# Altium PCB self.PcbDoc
Units mil, origin at the board's own origin, x right, y up, seen from the top; angles counter-clockwise.
Board outline 2675 x 2675 mil, 2 copper layers (Top Layer, Bottom Layer); 45 components, 40 nets, 191 pads, 56 vias.
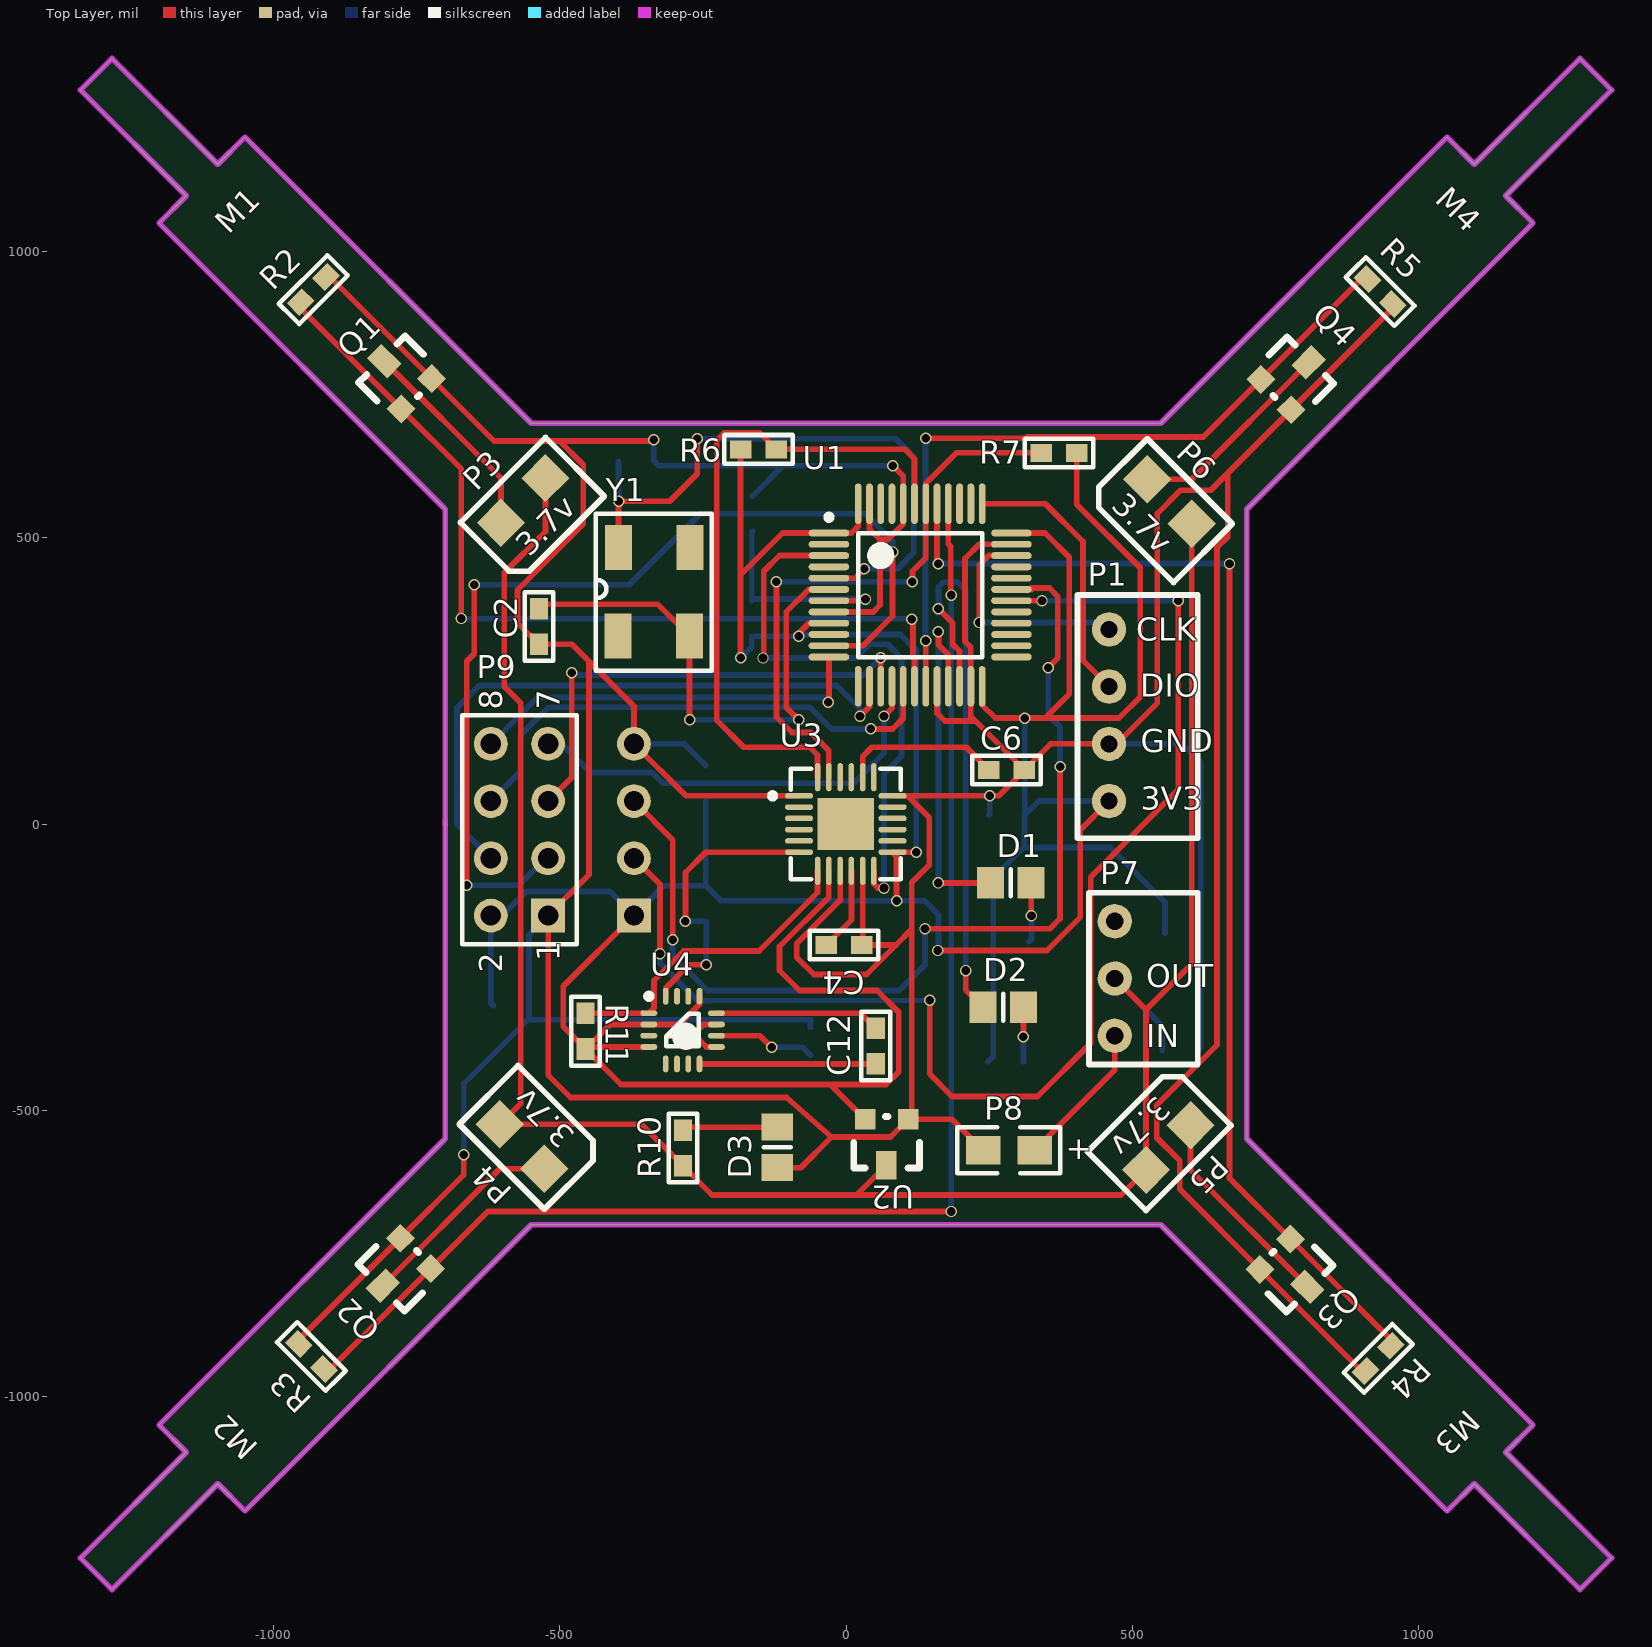
[diagram p0: Top Layer view]
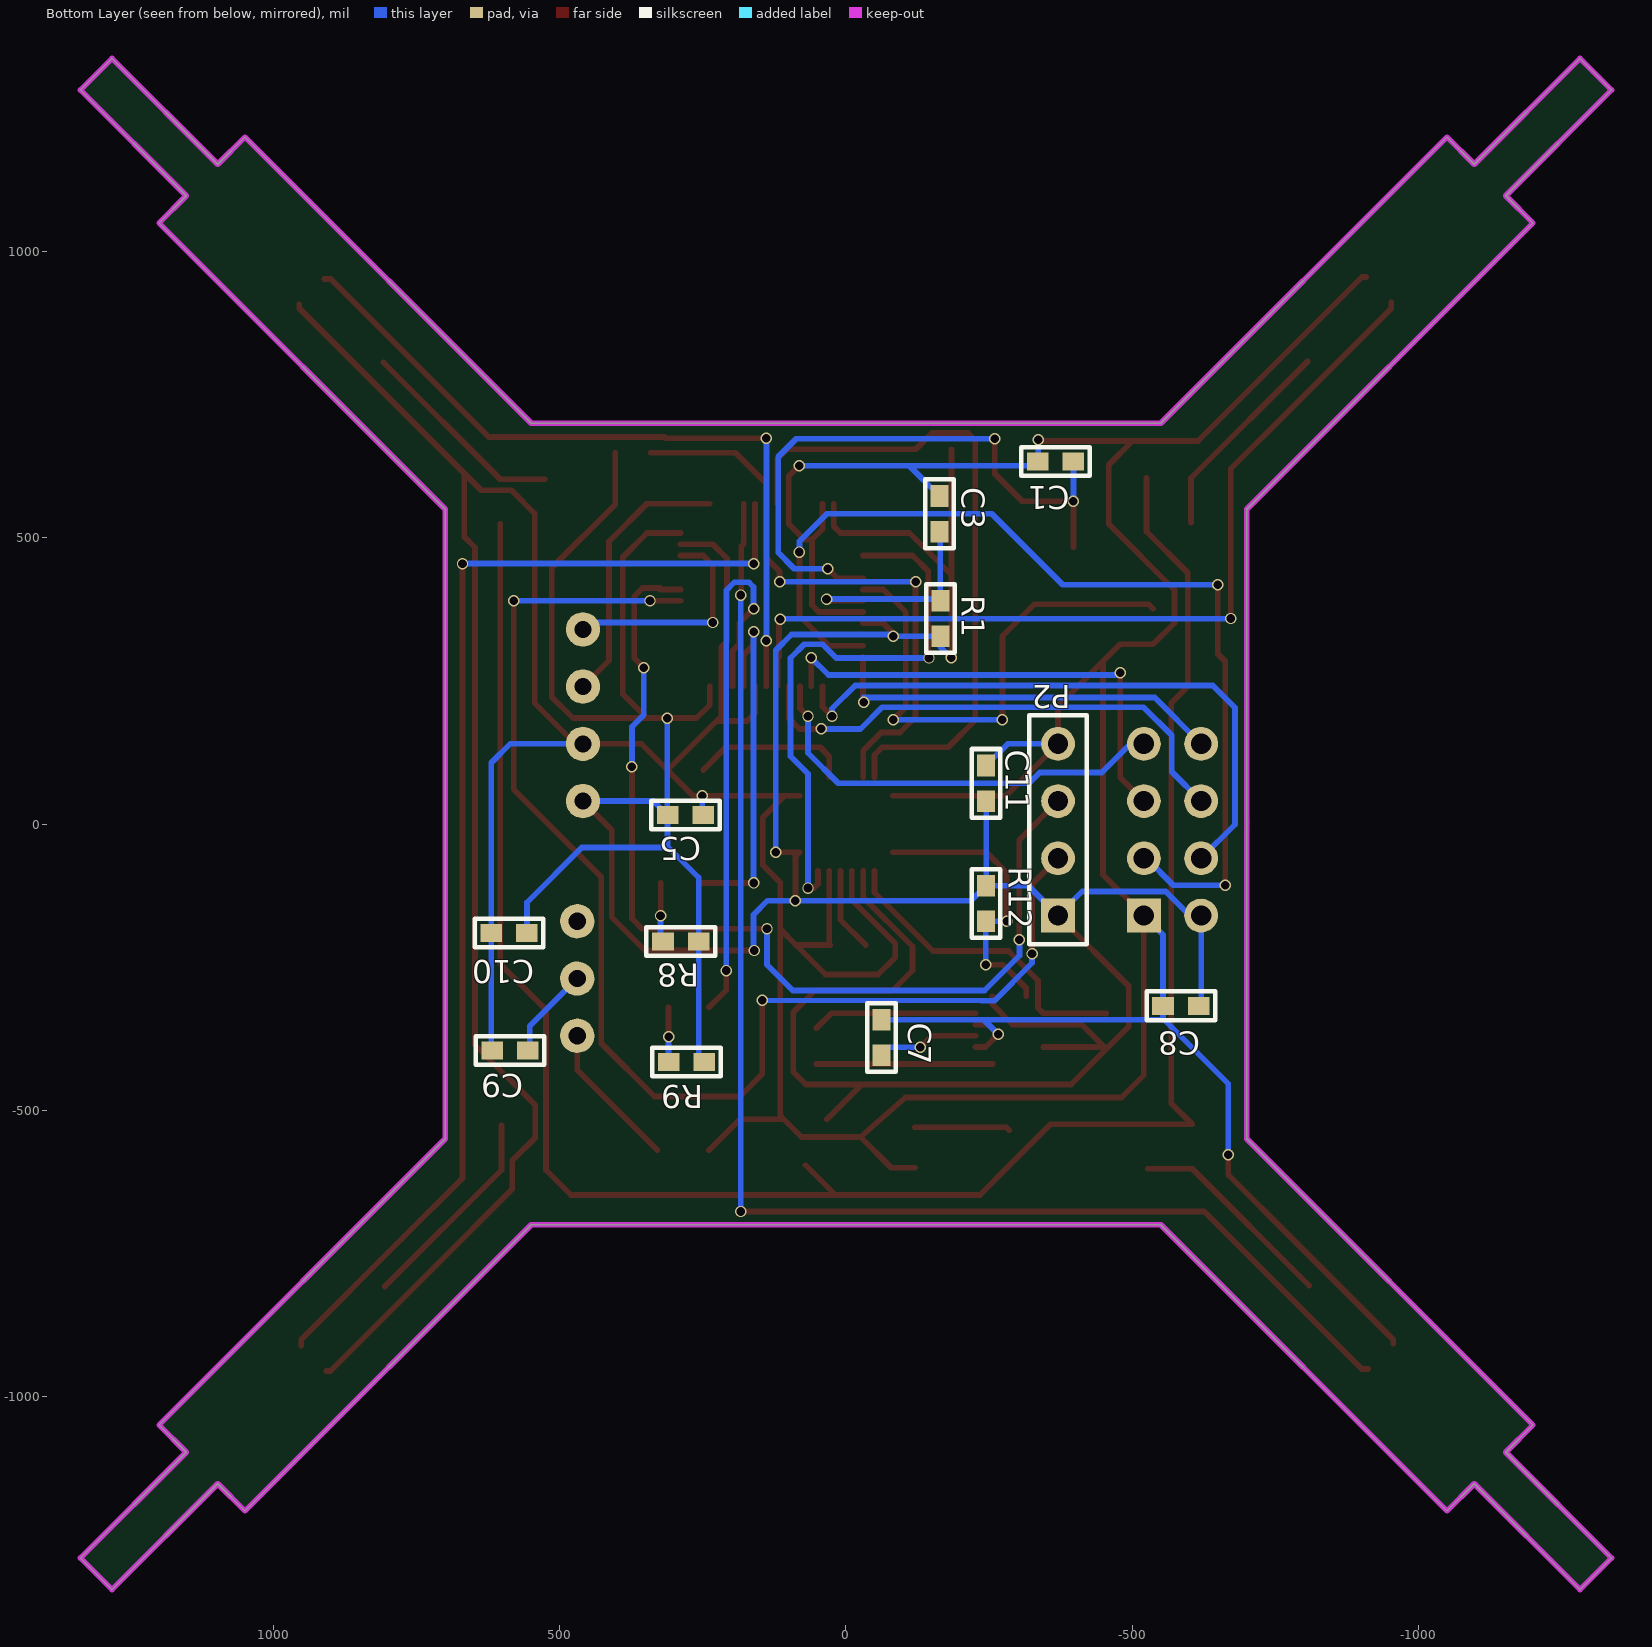
[diagram p1: Bottom Layer view, seen from below]
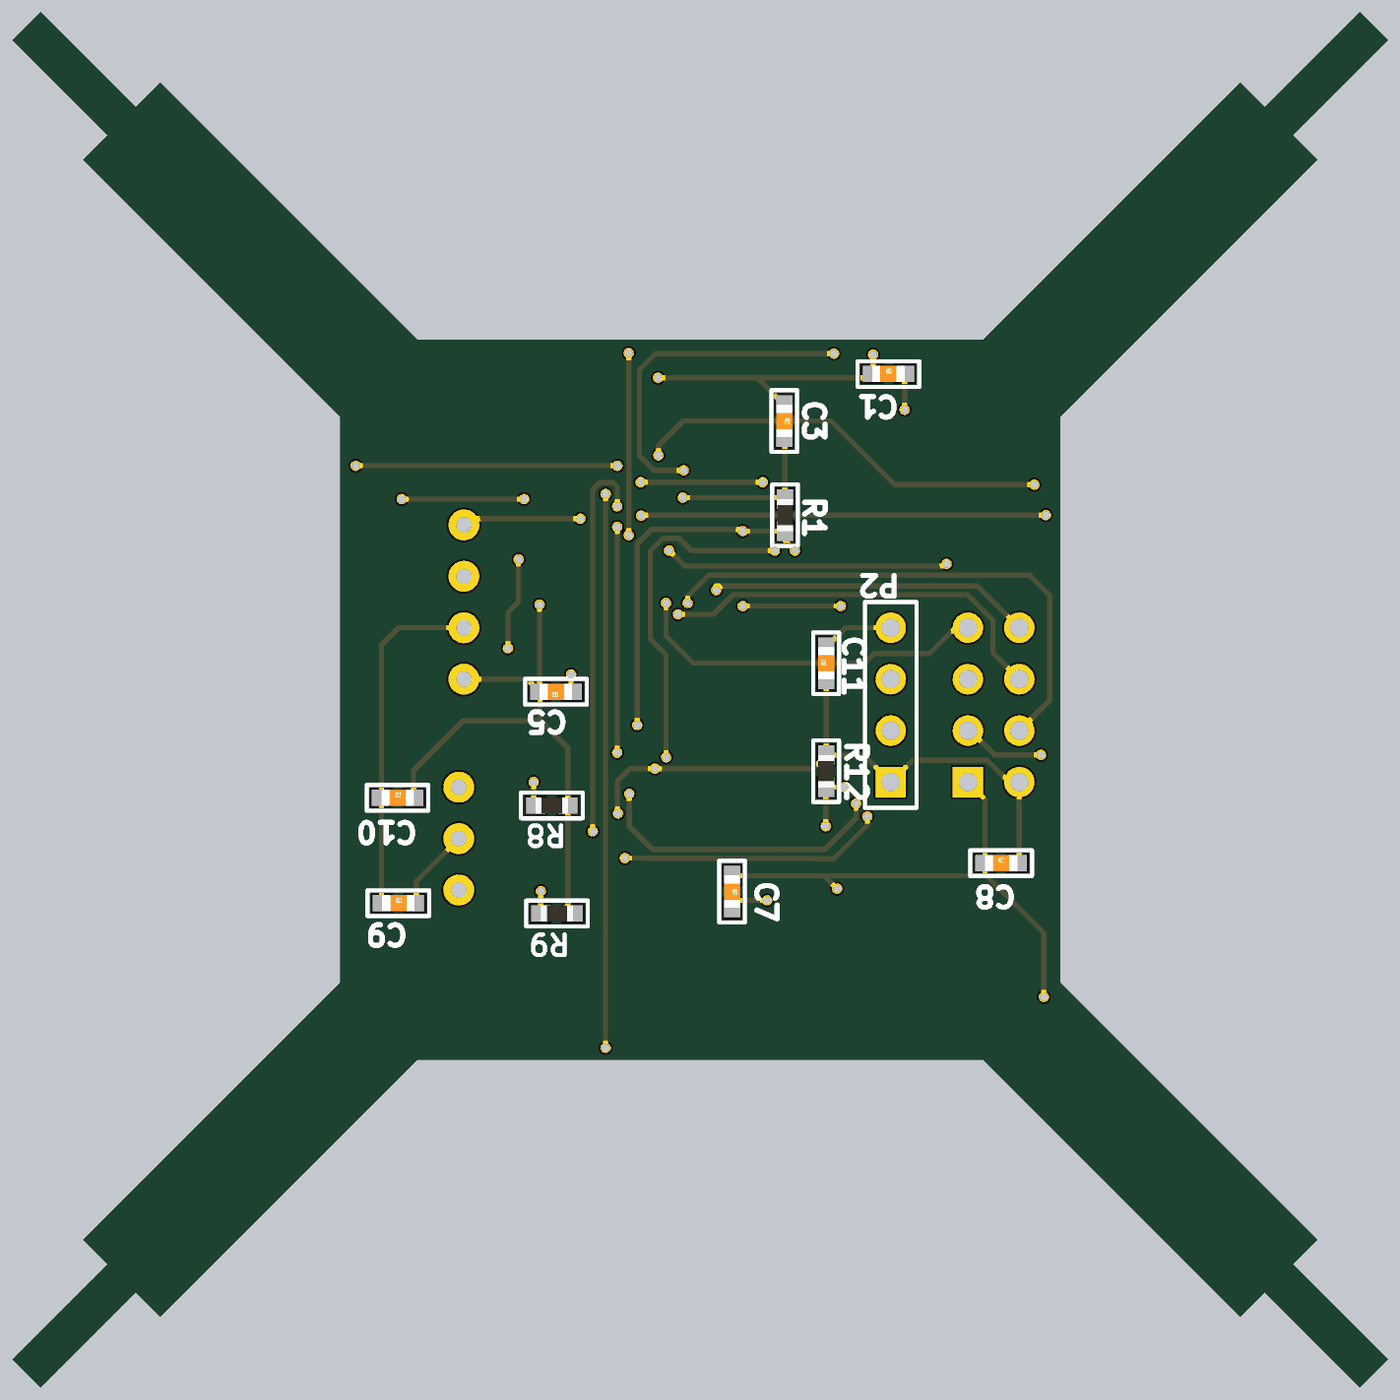
[diagram p2: 3D render of the assembled board from below, using the file's embedded part models]

## Layer stack, top to bottom
Top Solder: solder mask 0.4, Solder Resist, Dk 3.5
Top Layer: signal copper 1.4
Dielectric 1: dielectric 12.6, FR-4, Dk 4.8
Bottom Layer: signal copper 1.4
Bottom Solder: solder mask 0.4, Solder Resist, Dk 3.5

## Board outline
-1337.5,-1282.5 -1282.5,-1337.5 -1097.5,-1152.5 -1050,-1200 -550,-700 550,-700 1050,-1200 1097.5,-1152.5 1282.5,-1337.5 1337.5,-1282.5 1152.5,-1097.5 1200,-1050 700,-550 700,550 1200,1050 1152.5,1097.5 1337.5,1282.5 1282.5,1337.5 1097.5,1152.5 1050,1200 550,700 -550,700 -1050,1200 -1097.5,1152.5 -1282.5,1337.5 -1337.5,1282.5 -1152.5,1097.5 -1200,1050 -700,550 -700,-550 -1200,-1050 -1152.5,-1097.5

## Design rules (kind name [scope] priority, off if disabled: settings)
Clearance [All] p1: gap=7
MinimumSolderMaskSliver [All] p1: minsoldermaskwidth=0
PolygonConnect [All] p1: connectstyle=Relief reliefconductorwidth=10 reliefentries=4 polygonreliefangle="90 Angle" airgapwidth=10
RoutingVias [All] p1: holewidth=15 width=20 viastyle="Through Hole" minholewidth=15 minwidth=20 maxholewidth=20 maxwidth=25
SilkToSilkClearance [All] p1: silktosilkclearance=0
SilkToSolderMaskClearance [IsPad] p1: minsilkscreentomaskgap=1 clearancetoexposedcopper=TRUE
SolderMaskExpansion [All] p1: expansion=4
Width VCC3.7 [InNet('VCC_3.7VOUT')] p1 off: maxlimit=15 minlimit=10 preferedwidth=15
Width VCC [InNet('VCC')] p2 off: maxlimit=15 minlimit=10 preferedwidth=15
Width GND [InNet('GND')] p3 off: maxlimit=15 minlimit=10 preferedwidth=15
Width ALL [All] p4: maxlimit=15 minlimit=7 preferedwidth=10
26 further rules are at their usual default settings.

## Components (designator, comment, footprint, x,y, rotation, side; value= is the part's Value field where it differs from the comment)
C1 "Cap Semi" 0603-N-CAP -305,659 r180 bottom
C2 "Cap Semi" 0603-N-CAP -511,406 r270 top
C3 "Cap Semi" 0603-N-CAP -189,603 r270 bottom
C4 "Cap Semi" 0603-N-CAP 57.63,-237 r180 top
C5 "Cap Semi" 0603-N-CAP 219.58,-10 r0 bottom
C6 "Cap Semi" 0603-N-CAP 219.58,120 r0 top
C7 "Cap Semi" 0603-N-CAP -87.42,-312 r270 bottom
C8 "Cap Semi" 0603-N-CAP -524,-292 r180 bottom
C9 "Cap Semi" 0603-N-CAP 648,-370 r180 bottom
C10 "Cap Semi" 0603-N-CAP 649.58,-165 r180 bottom
C11 "Cap Semi" 0603-N-CAP -219.23,10 r90 bottom
C12 "Cap Semi" 0603-N-CAP 77.58,-327 r270 top
D1 "LED2" 6-0805_N 288,-103 r180 top
D2 "LED2" 6-0805_N 274.58,-320 r180 top
D3 "LED2" 6-0805_N -120.42,-565 r270 top
P1 "Header 4" SW_download 404.58,400 r0 top
P2 "Header 4" HDR1X4 -370.42,-160 r90 bottom
P3 "Motor1" Motor -555.42,555 r45 top
P4 "Motor2" Motor -555.42,-555 r135 top locked
P5 "Motor3" Motor 554.58,-555 r225 top
P6 "Motor4" Motor 554.58,555 r315 top
P7 "Switch" SWITCH 424.58,-120 r0 top
P8 "Power" 0805 329.58,-570 r180 top
P9 "NRF24L01" HDR2X4 -520.42,-160 r90 top
Q1 "SI2302" SOT-23 -805.42,810 r45 top
Q2 "SI2302" SOT-23 -810.42,-805 r135 top
Q3 "SI2302" SOT-23 804.58,-810 r225 top
Q4 "SI2302" SOT-23 809.58,805 r315 top
R1 "Res2" 0603-N-res -190.42,425 r270 bottom
R2 "Res1" 0603-N-res -995.42,905 r45 top
R3 "Res1" 0603-N-res -905.42,-995 r135 top
R4 "Res1" 0603-N-res 994.58,-905 r225 top
R5 "Res1" 0603-N-res 904.58,995 r315 top
R6 "Res2" 0603-N-res -87,629 r180 top
R7 "Res2" 0603-N-res 306,674 r0 top
R8 "Res2" 0603-N-res 354.58,-180 r180 bottom
R9 "Res2" 0603-N-res 344.58,-390 r180 bottom
R10 "Res2" 0603-N-res -259.24,-500 r270 top
R11 "Res2" 0603-N-res -429.24,-296 r270 top
R12 "Res2" 0603-N-res -219.24,-205 r90 bottom
U1 "STM32F103C8T6" LQFP48_N 129.58,400 r0 top
U2 "XC6206" SOT-23 68.58,-596 r180 top
U3 "MPU6050" "MPU 6050" -0.42,0 r0 top
U4 "HMC5883" HMC5883L -285.42,-375 r0 top
Y1 "8MHZ" 5032 -230,264 r180 top

## Footprints (in the part's own frame and the unit in brackets; to place one, negate y for a bottom-side part, rotate by r counter-clockwise, add the part's x,y. Pads: shape width x height; smd on the part's side, far side on the other; paste and mask are expansions set on the pad)
6-0805_N [mm] "Chip Resistor, Body 2.0x1.2mm, IPC Medium Density"
  rect 1.2x1.4 smd: 1(-0.9,0) 2(0.9,0)
  silkscreen extent 0,-0.6 0,0.6, body extent -1.07,-0.7 1.07,0.7, height 0.7
0603-N-CAP [mm]
  rect 0.96x0.8 smd: 1(0.76,-0.65) 2(2.34,-0.65)
  silkscreen extent 0.03,-1.29 3.07,-0.02, body extent 0.75,-1.05 2.35,-0.25, height 0.3
0603-N-res [mm]
  rect 0.96x0.8 smd: 1(0.887,-0.65) 2(2.467,-0.65)
  silkscreen extent 0.15,-1.28 3.2,-0.01, body extent 0.88,-1.05 2.48,-0.25, height 0.4
0805 [mil]
  rect 60x50 smd: 1(0,0) 2(90,0)
  silkscreen extent -45,-40 135,40
5032 [mm]
  rect 1.2x2 smd: 1(1.1,-1.633) 2(1.075,-5.57) 3(4.25,-5.57) 4(4.275,-1.633)
  silkscreen extent 0.11,-7.07 5.27,-0.08, body extent 1.1,-6.1 4.3,-1.07, height 0.8
HDR1X4 [mm] "Connector; Header; 4 Position"
  rect 1.5x1.5 hole 0.9: 1(0,0)
  round 1.5 hole 0.9: 2(2.54,0) 3(5.08,0) 4(7.62,0)
  silkscreen extent -1.27,-1.27 8.89,1.27
HDR2X4 [mm] "Connector; Header; 4x2 Position"
  rect 1.5x1.5 hole 0.9: 1(0,0)
  round 1.5 hole 0.9: 2(0,2.54) 3(2.54,0) 4(2.54,2.54) 5(5.08,0) 6(5.08,2.54) 7(7.62,0) 8(7.62,2.54)
  silkscreen extent -1.27,-1.27 8.89,3.81
HMC5883L [mm]
  oval 0.75x0.254 smd: 1(-1.5,1.131) 2(-1.5,0.631) 3(-1.5,0.131) 4(-1.5,-0.369) 9(1.5,-0.369) 10(1.5,0.131) 11(1.5,0.631) 12(1.5,1.131)
  oval 0.254x0.75 smd: 5(-0.75,-1.119) 6(-0.25,-1.119) 7(0.25,-1.119) 8(0.75,-1.119) 13(0.75,1.881) 14(0.25,1.881) 15(-0.25,1.881) 16(-0.75,1.881)
  silkscreen extent -1.62,-0.34 0.72,2.01, body extent -1.5,-1.12 1.5,1.88, height 0.9
LQFP48_N [mm] "Thin QFP, 48-Leads, Body 7x7mm, Pitch 0.5mm, IPC Medium Density"
  oval 1.8x0.3 smd: 1(-4.05,2.75) 2(-4.05,2.25) 3(-4.05,1.75) 4(-4.05,1.25) 5(-4.05,0.75) 6(-4.05,0.25) 7(-4.05,-0.25) 8(-4.05,-0.75) 9(-4.05,-1.25) 10(-4.05,-1.75) 11(-4.05,-2.25) 12(-4.05,-2.75) 25(4.05,-2.75) 26(4.05,-2.25) 27(4.05,-1.75) 28(4.05,-1.25) 29(4.05,-0.75) 30(4.05,-0.25) 31(4.05,0.25) 32(4.05,0.75) 33(4.05,1.25) 34(4.05,1.75) 35(4.05,2.25) 36(4.05,2.75)
  oval 0.3x1.8 smd: 13(-2.75,-4.05) 14(-2.25,-4.05) 15(-1.75,-4.05) 16(-1.25,-4.05) 17(-0.75,-4.05) 18(-0.25,-4.05) 19(0.25,-4.05) 20(0.75,-4.05) 21(1.25,-4.05) 22(1.75,-4.05) 23(2.25,-4.05) 24(2.75,-4.05) 37(2.75,4.05) 38(2.25,4.05) 39(1.75,4.05) 40(1.25,4.05) 41(0.75,4.05) 42(0.25,4.05) 43(-0.25,4.05) 44(-0.75,4.05) 45(-1.25,4.05) 46(-1.75,4.05) 47(-2.25,4.05) 48(-2.75,4.05)
  silkscreen extent -4.17,-2.75 2.75,3.57, body extent -3.5,-3.5 3.5,3.5, height 1.6
Motor [mil]
  rect 60x60 smd: 1(56.42,13.43) 2(-53.58,13.43)
  silkscreen extent -104,-82 106,63
"MPU 6050" [mm]
  oval 1.25x0.25 smd: 1(-2.075,1.25) 2(-2.075,0.75) 3(-2.075,0.25) 4(-2.075,-0.25) 5(-2.075,-0.75) 6(-2.075,-1.25) 13(2.075,-1.25) 14(2.075,-0.75) 15(2.075,-0.25) 16(2.075,0.25) 17(2.075,0.75) 18(2.075,1.25)
  oval 0.25x1.25 smd: 7(-1.25,-2.075) 8(-0.75,-2.075) 9(-0.25,-2.075) 10(0.25,-2.075) 11(0.75,-2.075) 12(1.25,-2.075) 19(1.25,2.075) 20(0.75,2.075) 21(0.25,2.075) 22(-0.25,2.075) 23(-0.75,2.075) 24(-1.25,2.075)
  rect 2.5x2.3 smd: 25(0,0)
  silkscreen extent -3.37,-2.45 2.45,2.45, body extent -2.41,-2.41 2.41,2.41, height 0.9
SOT-23 [mil]
  rect 36x36 smd: 1(-40,-80) 2(35,-80)
  rect 36x50 smd: 3(-2,0)
  silkscreen extent -60,-85 55,5
SW_download [mil]
  round 60 hole 30: 1(55,-360) 2(55,-260) 3(55,-160) 4(55,-60)
  silkscreen extent 0,-425 210,0
SWITCH [mil]
  round 60 hole 30: 1(45,-250) 2(45,-150) 3(45,-50)
  silkscreen extent 0,-300 190,0

## Part data
C1 C2 C3 C4 C5 C6 C7 C8 C9 C10 C11 C12: "Capacitor (Semiconductor SIM Model)"
D1 D2 D3: "Typical RED, GREEN, YELLOW, AMBER GaAs LED"
P1 P2: "Header, 4-Pin"
P3 P4 P5 P6 P8: library part "Header 2", "Header, 2-Pin"
P7: library part "Header 3", "Header, 3-Pin"
P9: library part "Header 4X2H", "Header, 4-Pin, Dual row, Right Angle"
Q1 Q2 Q3 Q4: library part MOSFET-N, "N-Channel MOSFET"
R1 R2 R3 R4 R5 R6 R7 R8 R9 R10 R11 R12: "Resistor"
U1: "STM32 ARM-based 32-bit MCU with 64 Kbytes Flash, 48-pin LQFP, Industrial Temperature"
Y1: library part XTAL, "Crystal Oscillator"

## Via types
v1: diameter 20, hole 15, Top Layer to Bottom Layer, 56 vias

## Nets (pads, with @x,y where several pads share a name; then routed paths per layer and width w, separated by ;. In a path a pad name is that pad's centre, name@x,y a point inside that pad or via, vN(x,y) a via of type N, cw(c..) or ccw(c..) an arc to the next point about the centre after c; other vN are vias at no path point)
AUX_CL: R11.1 U3.7 U4.1 | length 558.8
  Top Layer w10: R11.1 -454.38,-330.47 U4.1 -335.58,-321.58 -335.58,-273.48 -284.1,-222 -152,-222 -49.63,-119.63 U3.7
AUX_DA: R12.1 U3.6 U4.16 | length 512.4
  Top Layer w10: U4.16 -314.94,-286.82 -274.12,-246 v1(-244,-246) ; v1(-280.58,-170.08) -280.58,-84.88 -244.92,-49.22 U3.6
  Bottom Layer w10: v1(-280.58,-170.08) R12.1 -244,-170.91 v1(-244,-246)
CE: P9.3 U1.11 | length 1758.1
  Top Layer w10: v1(-662.58,-107) -662.58,284.42 -649.58,297.42 v1(-649.58,418.12) ; U1.11 29.72,311.42 81.42,363.12 v1(81.42,475.12)
  Bottom Layer w10: v1(-662.58,-107) -571.74,-107 -524.74,-60 P9.3 ; v1(-649.58,418.12) -378.58,418.12 -254.58,542.12 33.42,542.12 81.42,494.12 v1(81.42,475.12)
CSN: P9.4 U1.14 | length 1097.3
  Top Layer w10: v1(24.42,188.12) 41,204.7 U1.14
  Bottom Layer w10: P9.4 -679.58,-0.84 -679.58,203.12 -640.67,242.03 -16.03,242.03 24.42,201.58 v1(24.42,188.12)
GND: C1.1 C2.2 C3.1 C4.1 C5.1 C6.2 C7.1 C8.1 C9.1 C10.1 C11.2 D3.2 P1.2 P2.4 P8.2 P9.1 Q1.2 Q2.2 Q3.2 Q4.2 R2.2 R3.2 R4.2 R5.2 U1.8 U1.20 U1.23 U1.35 U1.44 U1.47 U2.1 U3.1 U3.9 U3.11 U3.18 U4.9 U4.11 | length 11858.5
  Top Layer w10: R3.2 -956,-901.09 Q2.2 -668,-613.08 v1(-668,-577.88) ; R2.2 -901.5,955.58 Q1.2 -615.04,669.12 -500.58,669.12 ; P9.1@-520.42,-170.72 -520.42,-438.58 -481.12,-477.88 -103.58,-477.88 -25.58,-546.88 ; P9.1 -449,-88.58 -449,284.29 ; v1(-336,671) -337.88,669.12 -500.58,669.12 ; U4.9 -243.77,-389.53 v1(-266,-367.3) -248.86,-350.16 U4.11 ; D3.2 -79.13,-600.43 -25.58,-546.88 ; U3.1 -279.63,49.21 P2.4 -370.42,205.71 -478.58,313.87 C2.2 -574,351.28 -574,409 -459,524 -459,627.54 -500.58,669.12 ; U1.8 47.47,370.47 59.42,382.42 59.42,497.12 ; U3.9 -10.26,-133.26 -86,-209 -86,-233 -56,-263 36,-263 87.59,-211.41 ; C4.1 87.59,-211.41 ; C4.1@29.11,-210 U3.11 ; U1.47 41,515.54 59.42,497.12 ; U3.18 107.33,49.21 ; v1(82,626) 100.06,607.94 U1.44 100.06,524.28 72.89,497.12 59.42,497.12 ; U1.20 159.11,193.89 173,180 225.88,180 218.17,187.72 U1.23 218.17,308.83 208,319 208,463.7 232.88,488.58 U1.35 ; 226,180.12 C6.2 ; P8.2 185.58,-516 U2.1 ; 667,613 667,502 648,483 648,413 648,-386 543,-491 543,-548 583,-588 583,-637.91 Q3.2 900.67,-955.58 R4.2 ; R5.2 955.17,901.09 Q4.2 637.08,583 584.3,583 544,542.7 544,211.58 472.42,140 P1.2 357.3,140 C6.2 ; -25.58,-546.88 77.7,-546.88 U2.1 ; 87.59,-211.41 115,-184 ; 107.33,49.21 v1(251,49.21) 267.21,49.21 312.06,94.06 C6.2 ; 107.33,49.21 145.42,11.12 145.42,-71.88 115,-102.3 115,-184 ; U2.1 115,-509.58 115,-184
  Bottom Layer w10: v1(-668,-577.88) -668,-454 -553.92,-339.92 C8.1 -553.92,-193.5 P9.1 ; -553.92,-341.92 -240.62,-341.92 ; P2.4 -282.7,140 C11.2 ; v1(-336,671) -336,634.48 C1.1 -327.52,626 -110.49,626 ; v1(-266,-367.3) -240.62,-341.92 ; C3.1 -110.49,626 ; C7.1@-61.83,-354.88 C7.1 -240.62,-341.92 ; v1(82,626) -110.49,626 ; C5.1 251,17.09 v1(251,49.21) ; P1.2 586.78,140 619.66,107.12 C10.1 619.66,-390.59 C9.1@614.66,-395.59
"IIC1 SCL": R7.1 U1.42 U3.23 | length 1041.5
  Top Layer w10: v1(-121.58,423) -121.58,186.73 -94.58,159.73 -61.73,159.73 -29.94,127.94 U3.23 ; v1(116,423) 116,441.54 139.43,464.96 U1.42 139.43,595.13 192.71,648.41 R7.1
  Bottom Layer w10: v1(-121.58,423) v1(116,423)
"IIC1 SDA": R6.1 U1.43 U3.24 | length 1177.2
  Top Layer w10: U3.24 -49.63,120.63 -63.12,134.12 -178.58,134.12 -226,181.54 -226,670 -213,683 -150.33,683 R6.1 102.95,654.59 119.74,637.8 U1.43
INT: U1.3 U3.12 | length 996.7
  Top Layer w10: v1@-143.58,290 -143.58,441.42 -116.1,468.9 U1.3 ; U3.12 48.8,-104.8 55.88,-111.88 v1(66.42,-111.88)
  Bottom Layer w10: v1(-145,290) 17,290 41.06,314.06 73.08,314.06 97,290.15 97,118.53 66.42,87.94 v1(66.42,-111.88)
IRQ: P9.8 U1.12 | length 711.8
  Top Layer w10: v1(-31,213) -29.87,214.13 U1.12
  Bottom Layer w10: P9.8 -539.3,221.12 -30,221.12 -31,220.12 v1(-31,213)
"LED GRE": D2.2 U1.22 | length 986.5
  Top Layer w10: v1(161.42,376.12) 186.42,351.12 186.42,314.12 198.48,302.06 U1.22 ; v1(209,-256) 209,-289.85 D2.2
  Bottom Layer w10: v1(161.42,376.12) 161.42,414.12 169.42,422.12 195.42,422.12 209,408.54 v1(209,-256)
"LED RED": D1.2 U1.21 | length 633
  Top Layer w10: v1(161.42,-103) D1.2 ; v1(161.42,336.12) 161.42,313.12 178.8,295.74 U1.21
  Bottom Layer w10: v1(161.42,-103) v1(161.42,336.12)
MISO: P9.7 U1.16 | length 759.5
  Top Layer w10: v1(66.42,188.12) 80.37,202.07 U1.16
  Bottom Layer w10: P9.7 -496.58,140 -446.7,90.12 -338.58,90.12 -319.58,71.12 13.42,71.12 66.42,124.12 v1(66.42,188.12)
MOSI: P9.6 U1.17 | length 905
  Top Layer w10: v1(43.42,166.12) 81.42,166.12 100.06,184.76 U1.17
  Bottom Layer w10: P9.6 -569,91.42 -569,155 -519.88,204.12 -63.12,204.12 -25.12,166.12 v1(43.42,166.12)
NetC1_2: C1.2 U1.5 Y1.3 | length 1094
  Top Layer w10: Y1.3 v1(-397.32,564) -308,564 -260,612 v1(-260,673) ; U1.5 15.53,429.53 v1(32,446)
  Bottom Layer w10: v1(-397.32,564) C1.2@-397.32,633.41 ; v1(-260,673) 87,673 118.42,641.58 118.42,474.12 90.3,446 v1(32,446)
NetC2_1: C2.1 U1.6 Y1.1 | length 915
  Top Layer w10: C2.1 -528.55,384.12 -329.13,384.12 Y1.1 v1(-273.32,182.12) ; v1(-82.58,182.12) -104.58,204.12 -104.58,370.29 -65.03,409.84 U1.6
  Bottom Layer w10: v1(-273.32,182.12) v1(-82.58,182.12)
NetC3_2: C3.2 R1.1 U1.7 | length 386.5
  Top Layer w10: U1.7 31.16,390.16 v1(34,393)
  Bottom Layer w10: C3.2 -164.83,509.45 R1.1 -161.91,393 v1(34,393)
NetC4_2: C4.2 U3.10 | length 147.9
  Top Layer w10: C4.2 9.43,-167.49 U3.10
NetC6_1: C6.1 U3.20 | length 279.8
  Top Layer w10: U3.20 29.11,118.11 45,134 209.92,134 C6.1
NetC7_2: C7.2 U4.10 | length 178.7
  Top Layer w10: U4.10 -150.16,-369.84 v1(-130,-390)
  Bottom Layer w10: v1(-130,-390) -75.95,-390 C7.2
NetC12_1: C12.1 U4.12 | length 289.3
  Top Layer w10: U4.12 25.54,-330.47 C12.1
NetC12_2: C12.2 U4.8 | length 307.9
  Top Layer w10: U4.8 -255.82,-419.13 C12.2
NetD1_1: D1.1 R8.1 | length 104.6
  Top Layer w10: D1.1 323.43,-159.43 v1(324,-160)
  Bottom Layer w10: R8.1 324,-201.25 v1(324,-160)
NetD2_1: D2.1 R9.1 | length 95.7
  Top Layer w10: v1(310.02,-372) D2.1
  Bottom Layer w10: R9.1 310.02,-415.24 v1(310.02,-372)
NetD3_1: D3.1 R10.1 | length 166.6
  Top Layer w10: R10.1 -279.47,-529.57 D3.1
NetP3_2: P3.2 Q1.3 | length 366.5
  Top Layer w10: Q1.3 -602.8,604.55 P3.2
NetP4_2: P4.2 Q2.3 | length 366.5
  Top Layer w10: Q2.3 -604.97,-602.38 P4.2
NetP5_2: P5.2 Q3.3 | length 366.5
  Top Layer w10: P5.2 601.97,-604.56 Q3.3
NetP6_2: P6.2 Q4.3 | length 366.5
  Top Layer w10: P6.2 604.14,602.38 Q4.3
PWM_DOWN: Q4.1 R5.1 U1.19 | length 1321
  Top Layer w10: v1(139,320) 139.43,319.57 U1.19 ; v1(139,674) 314.9,674 317.05,676.16 624.17,676.16 Q4.1 900.23,952.21 R5.1
  Bottom Layer w10: v1(139,320) v1(139,674)
PWM_LEFT: Q1.1 R2.1 U1.18 | length 2362.3
  Top Layer w10: R2.1 -952.63,900.65 Q1.1 -672,620.02 v1(-672,359) ; v1(115,358) 117,356 117,292 119.74,289.26 U1.18
  Bottom Layer w10: v1@-672,358.77 115,358.77 v1@-672,358.77
PWM_RIGHT: Q2.1 R3.1 U1.40 | length 2448.6
  Top Layer w10: R3.1 -901.06,-952.21 Q2.1 -625.85,-677 v1(184,-677) ; U1.40 178.8,489.2 183,485 183,401 v1(184,400)
  Bottom Layer w10: v1(184,-677) v1(184,400)
PWM_UP: Q3.1 R4.1 U1.41 | length 2097.6
  Top Layer w10: U1.41 159.11,456.89 v1(161,455) ; v1(670,455) 670,-618.85 Q3.1 951.8,-900.65 R4.1
  Bottom Layer w10: v1(161,455) v1(670,455)
RXD: P2.3 U1.31 | length 1757.2
  Top Layer w10: P2.3 -302.58,-27.83 v1@-302.58,-201.88 ; v1(138,-183) 356.3,-183 374,-165.3 v1(374,100) ; U1.31 324.42,409.84 324.42,412.16 355.38,412.16 370,397.54 370,290 v1(353,273)
  Bottom Layer w10: v1(-303,-201.88) -303,-230 -242.12,-290.88 93.12,-290.88 138,-246 v1(138,-183) ; v1(353,273) 353.42,272.58 353.42,190.58 374,170 v1(374,100)
SCK: P9.5 U1.15 | length 844.7
  Top Layer w10: P9.5 -478.89,81.53 v1@-478.89,264.12 ; U1.15 v1(60.69,290.12)
  Bottom Layer w10: v1(-479,264.12) -475,260.12 30.69,260.12 v1(60.69,290.12)
SWCLK: P1.3 U1.37 | length 475.9
  Top Layer w10: U1.37 348.09,559.45 414,493.54 414,285.58 P1.3
SWDIO: P1.4 U1.34 | length 402
  Top Layer w10: v1(233,352) 233,452.48 249.42,468.9 U1.34
  Bottom Layer w10: v1@233,352.12 459.58,352.12 P1.4
TXD: P2.2 U1.30 | length 2293
  Top Layer w10: P2.2 -325,-105.42 v1(-325,-227) ; v1(146.42,-307.88) 146.42,-436.88 185.42,-475.88 334.42,-475.88 427.42,-382.88 427.42,-92.58 580.42,60.42 v1(580.42,390.16) ; U1.30 v1(342.42,390.16)
  Bottom Layer w10: v1(-325,-227) -325,-243 -259,-309 -237,-309 v1(146.42,-307.88) ; v1(342.42,390.16) v1(580.42,390.16)
VCC: C5.2 C8.2 C10.2 C11.1 P1.1 P2.1 P9.2 R1.2 R6.2 R7.2 R8.2 R9.2 R11.2 R12.2 U1.1 U1.9 U1.24 U1.36 U1.48 U2.2 U3.8 U3.13 U4.2 U4.4 U4.13 | length 7520.9
  Top Layer w10: P2.1 -494,-283.58 -494,-353.95 R11.2 ; U4.4 R11.2@-451.23,-389.53 ; U4.13 -255.89,-315.07 -290.98,-350.16 U4.2 -411.86,-350.16 R11.2@-451.23,-389.53 ; v1(-184.13,290.12) R6.2 ; -184.13,434.87 -110.73,508.27 U1.1 9.42,508.27 21.32,520.17 U1.48 ; v1(-82.58,327.87) -82.58,333.24 -65.03,350.79 U1.9 ; U3.8 -29.94,-127.94 -116,-214 -116,-256 -81,-291 54,-291 92,-329 92,-433 70,-455 -27.42,-455 ; U2.2 -27.42,-455 ; v1(88.42,-133.88) 88.42,-56.36 U3.13 v1(122.59,-49.22) ; v1(160,-221) 351,-221 409.42,-162.58 409.42,-10.16 P1.1 ; U1.24@237.85,240.12 U1.24 237.85,208.15 261,185 v1(312.42,185) ; U1.36 347.73,508.27 390,466 390,227 348,185 v1(312.42,185) ; R7.2 403.13,558.41 514,447.54 514,222 477,185 v1(312.42,185) ; R11.2 R11.2@-451.23,-389.53 ; R11.2 -392.95,-455 -27.42,-455
  Bottom Layer w10: C8.2 -620.42,-313.3 P9.2 -600.7,-160 -558.58,-117.88 -412.53,-117.88 P2.1 -318.29,-107.87 R12.2 ; C11.1 -244.83,-34.88 R12.2 ; v1(-184.13,290.12) -164.83,309.42 R1.2 v1(-82.58,327.87) -79.39,331.06 95.09,331.06 122.59,303.57 v1(122.59,-49.22) ; v1@161.42,-221 161.42,-158.42 136.88,-133.88 v1(88.42,-133.88) -218.82,-133.88 R12.2 ; R9.2 257.46,-405.59 R8.2 257.46,-93.54 311.71,-39.29 ; v1(312.42,185) C5.2@312.42,15.59 ; P1.1 336.83,40 C5.2@312.42,15.59 ; C10.2 557.46,-136.92 461.54,-41 311.71,-41 311.71,-39.29 ; 311.71,-39.29 C5.2 C5.2@312.42,15.59
VCC_3.7VOUT: C9.2 P3.1 P4.1 P5.1 P6.1 P7.2 R10.2 U2.3 | length 3856.9
  Top Layer w10: P3.1 -525.02,510.98 -597,439 -597,240 -568,211 -568,-487.8 P4.1 -357.35,-524.6 R10.2 -233.95,-648 18.58,-648 ; U2.3 18.58,-648 ; P7.2 524.18,-324.6 ; P6.1 603.97,-244.82 524.18,-324.6 ; 18.58,-648 480.57,-648 P5.1 524.18,-324.6
  Bottom Layer w10: P7.2 552.46,-352.87 C9.2@552.46,-395.59
VCC_BAT_3.7V: P7.1 P8.1 | length 258
  Top Layer w10: P8.1 469.58,-430 P7.1
pads on no net: P7.3 U1.2 U1.4 U1.10 U1.13 U1.25 U1.26 U1.27 U1.28 U1.29 U1.32 U1.33 U1.38 U1.39 U1.45 U1.46 U3.2 U3.3 U3.4 U3.5 U3.14 U3.15 U3.16 U3.17 U3.19 U3.21 U3.22 U3.25 U4.3 U4.5 U4.6 U4.7 U4.14 U4.15 Y1.2 Y1.4
copper on no net: | length 5.7
  Top Layer w10: -700.01,5.7 cw(c-2000,0) -700,0

## Keep-outs
Keep-Out Layer:
  the board outline again, w10

## Silkscreen, mask and mechanical layers (free items; w line width, h text height)
Top Overlay:
  text "M4" at 1027,1089 h40 r315
  text "M1" at -1078,1029 h40 r45
  text "+" at 384,-586 h40
  text "M3" at 1084,-1021 h40 r225
  text "M2" at -1024,-1086 h40 r135

## Text inside footprints (layer, text, board x,y; h text height)
P1: Top Overlay "3V3" at 514.58,25 h40; Top Overlay "GND" at 514.58,125 h40; Top Overlay "DIO" at 514,222 h40; Top Overlay "CLK" at 507,320 h40
P3: Top Overlay "3.7v" at -553,465 h40 r45
P4: Top Overlay "3.7v" at -471,-542 h40 r135
P5: Top Overlay "3.7v" at 543,-473 h40 r225
P6: Top Overlay "3.7v" at 462,554 h40 r315
P7: Top Overlay "IN" at 524.58,-390 h40; Top Overlay "OUT" at 524.58,-285 h40
P9: Top Overlay "8" at -600.42,200 h40 r90; Top Overlay "7" at -500.42,200 h40 r90; Top Overlay "1" at -500.42,-240 h40 r90; Top Overlay "2" at -600.42,-260 h40 r90